# Allegro board MainBord_Layout.brd
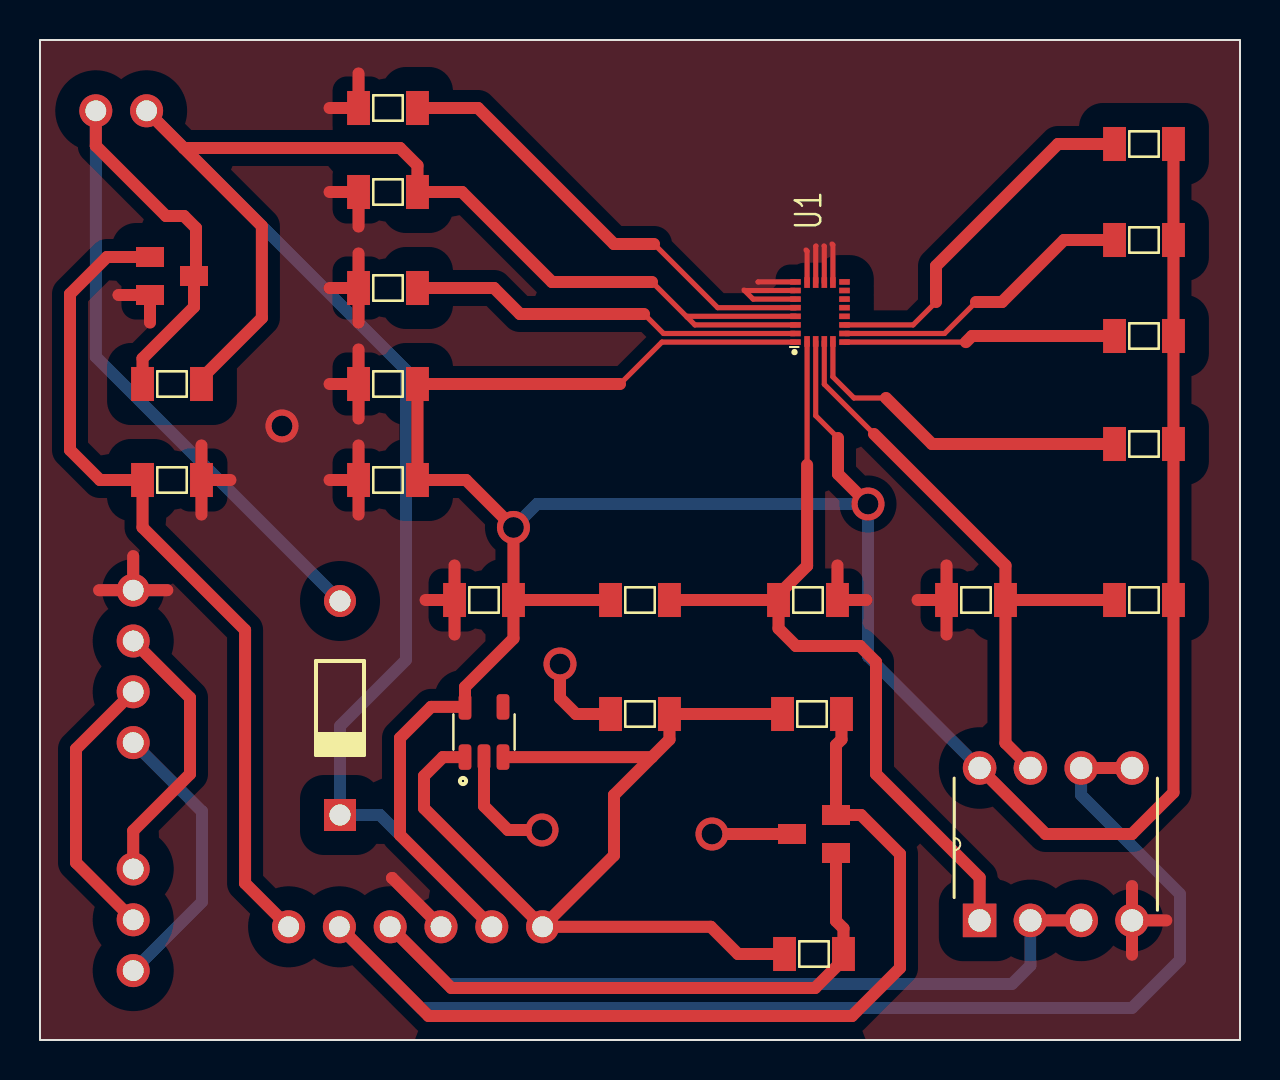
[diagram p0: board, top side]
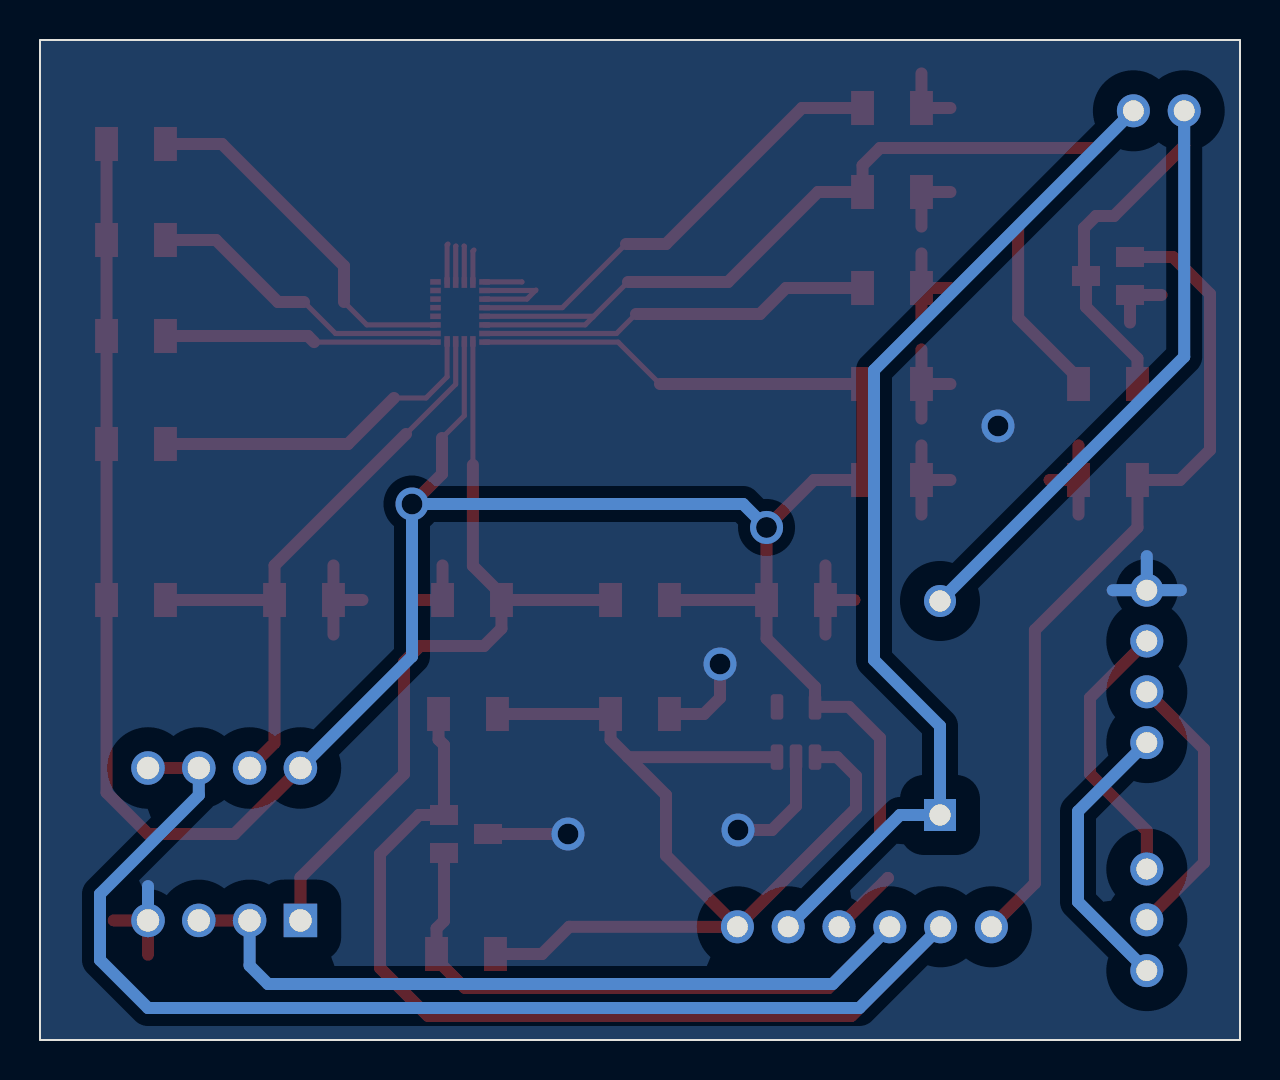
[diagram p1: board, bottom side, seen from below]

Outline 60 x 50 mm; copper layers: TOP, BOTTOM. Coordinates in mm from the lower left corner of the outline.
Outline path: rectangle 0,0 60,50

## Design rules (mm)
constraint set DEFAULT: min track width 0.127

## Placement (name value [footprint] x y rotation side)
C1  10n  [1206]  17.4 46.6 0 top
C2  100n  [1206]  17.4 37.6 0 top
C3  100n  [1206]  17.4 42.4 0 top
C4  100n  [1206]  17.4 28 0 top
C5  10n  [1206]  17.4 32.8 0 top
C6  100p  [1206]  46.8 22 0 top
C7  100p  [1206]  38.4 22 180 top
C8  4.7u  [1206]  30 16.3 0 top
C9  4.7u  [1206]  22.2 22 0 top
C11  100p  [1206]  6.6 32.8 0 top
D1  BAT54A/SOT  [SOT23]  38.7 10.3 90 top
D2  IN4007  [DIOAD1070W78L470D235P]  15 16.6 90 top
J1  CON6  [MOLEXCON6_1MM]  26.4 8.2 270 top
J2  CON3  [MOLEXCON3_1MM]  7.2 2.2 180 top
J3  CON4  [MOLEXCON4_1MM]  7.2 13.6 180 top
J4  CON2  [MOLEXCON2_1MM]  6.6 49 270 top
Q1  2N7002/SOT  [SOT23]  6.6 38.2 270 top
R1  1k  [1206]  30 22 0 top
R2  1k  [1206]  55.2 22 180 top
R3  10k  [1206]  55.2 29.8 180 top
R4  10k  [1206]  55.2 35.2 180 top
R5  10k  [1206]  55.2 40 180 top
R6  10k  [1206]  55.2 44.8 180 top
R7  330  [1206]  38.7 4.3 0 top
R8  330  [1206]  38.6 16.3 0 top
R9  10k  [1206]  6.6 28 0 top
U1  LSM9DS1  [PQFN24P43_350X300X102L35X23]  39 36.4 90 top
U2  P82B96P  [DIP254P762X508-8]  54.6 13.6 90 top
U3  LP2981-33DBVR  [SOT95P280X145-5N]  22.2 15.4 90 top

## Library data of the parts
C1-C9 C11 = CAP NP
D1 = BAT54A/SOT
D2 = IN4007
J1 = CON6
J2 = CON3
J3 = CON4
J4 = CON2
Q1 = 2N7002/SOT
R1-R9 = R
U1 = LSM9DS1
U2 = P82B96P
U3 = LP2981-33

## Footprints (pads in the part's own frame, mm; a bottom-side part is the same pattern mirrored in y, then rotated)
1206
  rect 1.143x1.702 smd: 1(-1.473,0) 2(1.473,0)
DIOAD1070W78L470D235P
  round 1.6 hole 1.05: A(5.35,0)
  rect 1.6x1.6 hole 1.05: C(-5.35,0)
DIP254P762X508-8
  rect 1.676x1.676 hole 1.118: 1(-7.62,7.62)
  round 1.676 hole 1.118: 2(-7.62,5.08) 3(-7.62,2.54) 4(-7.62,0) 5(0,0) 6(0,2.54) 7(0,5.08) 8(0,7.62)
MOLEXCON2_1MM
  round 1.651 hole 1.041: 1(2.54,-1.27) 2(2.54,-3.81)
MOLEXCON3_1MM
  round 1.651 hole 1.041: 1(2.54,-1.27) 2(2.54,-3.81) 3(2.54,-6.35)
MOLEXCON4_1MM
  round 1.651 hole 1.041: 1(2.54,-1.27) 2(2.54,-3.81) 3(2.54,-6.35) 4(2.54,-8.89)
MOLEXCON6_1MM
  round 1.651 hole 1.041: 1(2.54,-1.27) 2(2.54,-3.81) 3(2.54,-6.35) 4(2.54,-8.89) 5(2.54,-11.43) 6(2.54,-13.97)
PQFN24P43_350X300X102L35X23
  rect 0.28x0.53 smd: 1(-1.505,1.225) 6(-1.505,-1.225) 7(-1.075,-1.225) 8(-0.645,-1.225) 9(-0.215,-1.225) 10(0.215,-1.225) 11(0.645,-1.225) 12(1.075,-1.225) 13(1.505,-1.225) 18(1.505,1.225) 19(1.075,1.225) 20(0.645,1.225) 21(0.215,1.225) 22(-0.215,1.225) 23(-0.645,1.225) 24(-1.075,1.225)
  rect 0.53x0.28 smd: 2(-1.47,0.645) 3(-1.47,0.215) 4(-1.47,-0.215) 5(-1.47,-0.645) 14(1.47,-0.645) 15(1.47,-0.215) 16(1.47,0.215) 17(1.47,0.645)
SOT23
  rect 1x1.4 smd: 1(-0.95,-1.1) 2(0.95,-1.1) 3(0,1.1)
SOT95P280X145-5N
  custom 1.27x0.635 smd: 1(-1.255,0.95) 2(-1.255,0) 3(-1.255,-0.95) 4(1.255,-0.95) 5(1.255,0.95)

## Nets
GND: C1.1 C2.1 C3.1 C4.1 C5.1 C6.1 C7.1 C8.1 C9.1 D1.3 J1.3 J3.4 Q1.2(SOURCE) R9.2 U1.14 U1.15 U1.16 U1.17 U1.18 U1.19 U1.20 U2.4 U3.2
VCC_3V3: C3.2 C4.2 C5.2 C9.2 C11.2 D2.C J1.2 J4.1 R1.1 R2.1 R3.1 R4.1 R5.1 R6.1 U1.1 U1.3 U1.22 U1.23(VDD__1) U2.8(VCC) U3.5(VOUT)
VIN: C8.2 J1.1 R7.1 R8.1 U3.1 U3.3
LKEY: J2.1 J3.1
MOTOR: J1.6 Q1.1 R9.1
RKEY: J2.2 J3.2
SCL_3V3: C7.2 R1.2 U1.2 U2.1
SCL_5V: D1.1 J1.4 R7.2 U2.2 U2.3
SDA_3V3: C6.2 R2.2 U1.4 U2.7
SDA_5V: D1.2 J1.5 R8.2 U2.5 U2.6
SWC: J2.3 J3.3
N00502: C1.2 U1.21
N01168: R4.2 U1.6
N01175: R3.2 U1.5
N01255: R5.2 U1.7
N01262: R6.2 U1.8
N01338: C2.2 U1.24
N11946: C11.1 D2.A J4.2 Q1.3

Pads without a net: U1 9 10 11 12 13; U3 4

## Via types
v1: diameter 1.651, hole 1.041, TOP to BOTTOM, 6 vias

## Routing (per net, layer and track width the routed paths; a pad name or vN(x,y) marks a point on that pad's centre or on a via; arc(x,y) is an arc through that point)
GND: length 91.3
  TOP w0.254: 35.9,37.9 35.91,37.91 37.77,37.91 ; 38.8,39.7 38.78,39.69 U1.16 ; U1.17 38.36,39.45 38.3,39.5 ; 35.23,37.48 35.2,37.5 ; 35.23,37.48 U1.19 ; 35.23,37.48 35.66,37.05 U1.20 ; U1.15 39.22,39.69 39.2,39.7 ; U1.14 39.64,39.76 39.6,39.8
  TOP w0.6: 14.48,32.8 C5.1 ; C5.1 15.93,34.53 ; C5.1 15.93,31.07 ; 15.93,35.87 C2.1 ; C2.1 14.48,37.6 ; C2.1 15.93,39.33 ; C8.1 26.8,16.3 26,17.1 v1(26,18.8) ; C4.1 15.93,29.73 ; C4.1 14.48,28 ; C4.1 15.93,26.27 ; v1(25.1,10.5) 23.4,10.5 22.2,11.7 U3.2 ; 8.07,26.27 R9.2 ; R9.2 9.52,28 ; R9.2 8.07,29.73 ; 39.87,23.73 C7.1 41.32,22 ; U2.4 56.32,5.98 ; U2.4 54.6,4.26 ; U2.4 54.6,7.7 ; C9.1 20.73,23.73 ; C9.1 20.73,20.27 ; C9.1 19.28,22 ; 17.6,8.1 17.61,8.1 J1.3 ; 45.33,20.27 C6.1 ; C6.1 43.88,22 ; C6.1 45.33,23.73 ; 3.92,37.25 Q1.2 5.5,35.87 ; v1(33.6,10.3) D1.3 ; J3.4 4.66,24.19 ; J3.4 6.36,22.49 ; J3.4 2.96,22.49 ; 14.48,42.4 C3.1 15.93,40.67 ; 14.48,46.6 C1.1 15.93,48.33
  BOTTOM w0.6: 2.96,22.49 J3.4 ; J3.4 4.66,24.19 ; J3.4 6.36,22.49 ; U2.4 54.6,7.7
  vias: v1(12.1,30.7)
VCC_3V3: length 257.6
  TOP w0.254: U1.23 32.74,35.76 32.35,36.15 ; 30.6,37.9 32.35,36.15 ; 32.35,36.15 32.38,36.19 U1.22 ; 29,32.8 31.09,34.89 U1.1 ; U1.3 38.78,31.21 39.9,30.1
  TOP w0.6: J1.2 18,10.25 18,15.1 19.55,16.66 U3.5 21.25,17.65 23.67,20.07 C9.2 ; R2.1 56.67,12.37 54.6,10.3 50.28,10.3 U2.8 ; R2.1 56.7,21.97 ; R2.1 R3.1 R4.1 R5.1 R6.1 ; C9.2 R1.1 ; C9.2 v1(23.67,25.63) 21.3,28 C4.2 C5.2 29,32.8 ; v1(41.4,26.8) 39.9,28.3 39.9,30.1 ; 7.19,44.6 J4.1 ; 7.19,44.6 11.09,40.7 11.09,36.1 8.07,33.08 C11.2 8.07,32.52 ; 7.19,44.6 18,44.6 18.87,43.73 C3.2 21.1,42.4 25.6,37.9 30.6,37.9
  BOTTOM w0.6: v1(23.67,25.63) 24.85,26.8 v1(41.4,26.8) 41.4,19.18 U2.8 ; J1.2 17,11.25 D2.C 15,15.7 18.3,19 18.3,33.49 J4.1
VIN: length 51.5
  TOP w0.6: 30.6,14.14 28.7,12.25 28.7,9.23 J1.1 ; 30.6,14.14 U3.3 ; 30.6,14.14 31.47,15.02 C8.2 R8.1 ; R7.1 34.9,4.3 33.54,5.66 J1.1 ; U3.1 20.14,14.14 19.2,13.2 19.2,11.59 J1.1
LKEY: length 14.2
  BOTTOM w0.6: J3.1 8.1,11.43 8.1,6.91 J2.1
MOTOR: length 42.2
  TOP w0.6: Q1.1 3.35,39.15 1.5,37.3 1.5,29.5 3,28 R9.1 5.13,25.63 10.25,20.5 10.25,7.84 J1.6
RKEY: length 13.8
  TOP w0.6: J2.2 1.8,8.87 1.8,14.55 J3.2
SCL_3V3: length 41
  TOP w0.254: U1.2 38.36,28.75
  TOP w0.6: C7.2 R1.2 ; C7.2 36.93,20.57 37.8,19.7 41,19.7 41.8,18.9 41.8,13.3 46.98,8.12 U2.1 ; C7.2 36.93,22.28 38.36,23.71 38.36,28.75
SCL_5V: length 68.4
  TOP w0.6: U2.2 U2.3 ; J1.4 20.57,2.6 38.75,2.6 40.17,4.02 R7.2 40.17,5.58 39.8,5.95 D1.1
  BOTTOM w0.6: U2.2 49.52,3.72 48.6,2.8 20.37,2.8 J1.4
SDA_3V3: length 31.1
  TOP w0.254: 41.7,30.3 39.22,32.78 U1.4
  TOP w0.6: C6.2 48.27,14.85 U2.7 ; C6.2 R2.2 ; C6.2 48.27,23.73 41.7,30.3
SDA_5V: length 104.6
  TOP w0.6: U2.6 U2.5 ; J1.5 19.43,1.2 40.6,1.2 43,3.6 43,9.3 41.05,11.25 D1.2 39.8,14.75 40.07,15.02 R8.2
  BOTTOM w0.6: J1.5 19.03,1.6 54.6,1.6 57,4 57,7.3 52.06,12.24 U2.6
SWC: length 13.8
  TOP w0.6: J3.3 7.5,17.11 7.5,13.3 4.66,10.46 J2.3
N00502: length 23
  TOP w0.254: U1.21 33.88,36.62 30.7,39.8
  TOP w0.6: C1.2 21.9,46.6 28.7,39.8 30.7,39.8
N01168: length 13.6
  TOP w0.254: U1.6 46.3,34.89
  TOP w0.6: 46.3,34.89 46.6,35.2 R4.2
N01175: length 17.2
  TOP w0.254: 42.3,32.1 40.7,32.1 39.64,33.16 U1.5
  TOP w0.6: 42.3,32.1 44.6,29.8 R3.2
N01255: length 15.4
  TOP w0.254: 46.8,36.9 45.23,35.33 40.23,35.33
  TOP w0.6: R5.2 51.2,40 48.1,36.9 46.8,36.9
N01262: length 18.3
  TOP w0.254: U1.8 43.66,35.76 44.8,36.9
  TOP w0.6: R6.2 50.9,44.8 44.8,38.7 44.8,36.9
N01338: length 19.8
  TOP w0.254: 30.2,36.3 31.18,35.33 37.77,35.33
  TOP w0.6: C2.2 22.7,37.6 24,36.3 30.2,36.3
N11946: length 46.9
  TOP w0.6: J4.2 2.79,44.71 6.3,41.2 7.2,41.2 7.8,40.6 7.8,38.3 Q1.3 7.7,36.65 5.13,34.08 C11.1
  BOTTOM w0.6: J4.2 2.79,34.16 D2.A

## Copper pours and planes (outline as drawn; the poured copper is in the pictures)
GND on TOP: 0,50 60,50 60,0 0,0 ; 18 cut-outs
GND on BOTTOM: 0,50 60,50 60,0 0,0 ; 2 cut-outs
